# Altium PCB OpenHEG.PcbDoc
Units mm, origin at the board's own origin, x right, y up, seen from the top; angles counter-clockwise.
Board outline 52.5 x 24 mm, 2 copper layers (Top Layer, Bottom Layer); 23 components, 18 nets, 77 pads, 13 vias.
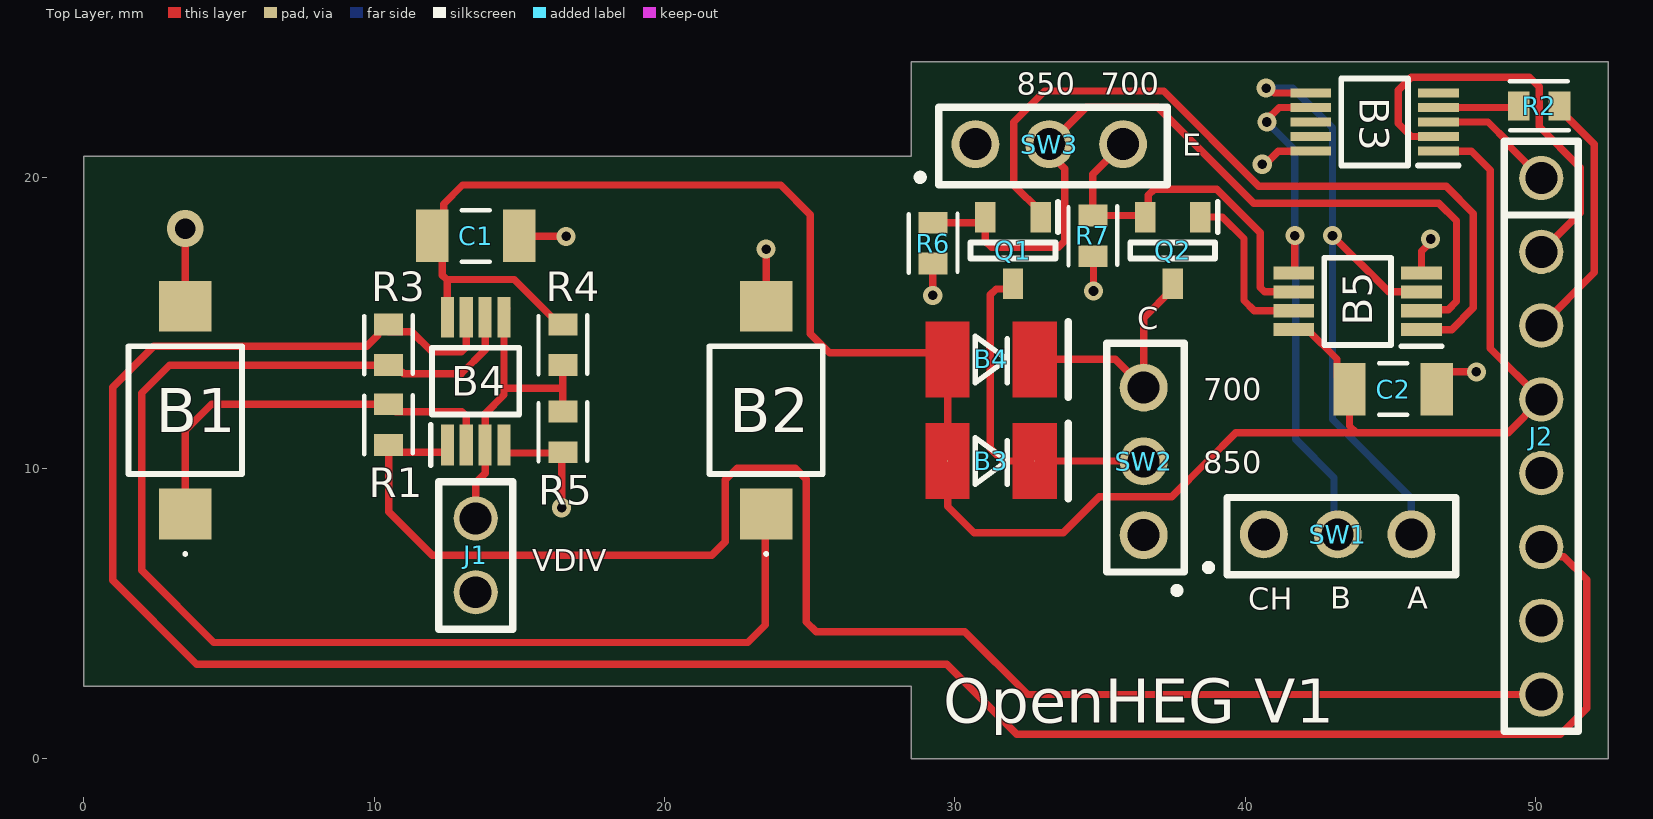
[diagram p0: Top Layer view]
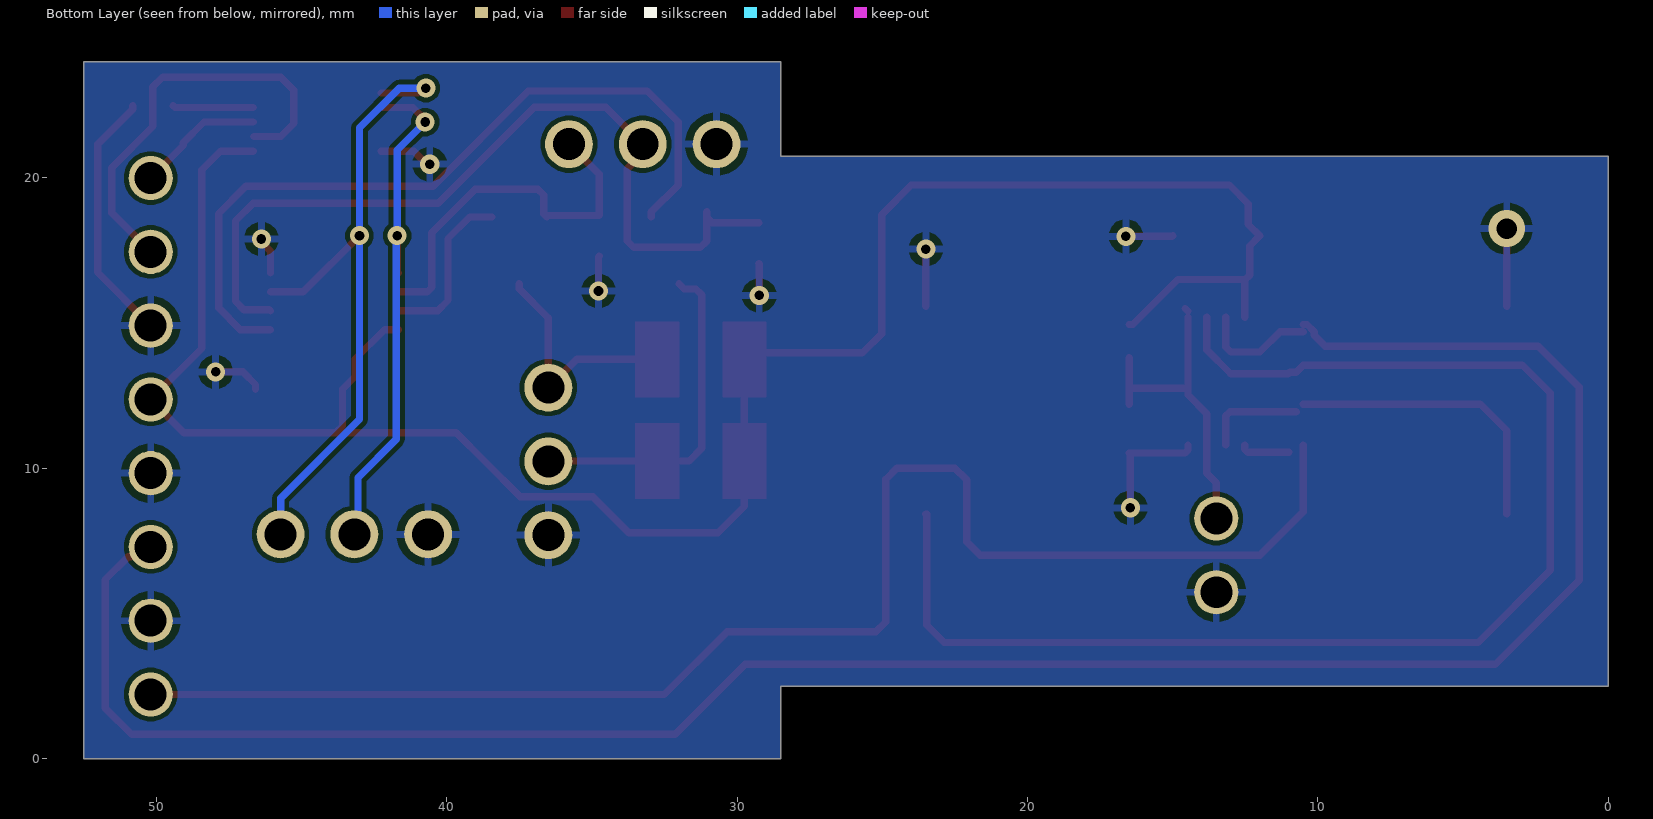
[diagram p1: Bottom Layer view, seen from below]
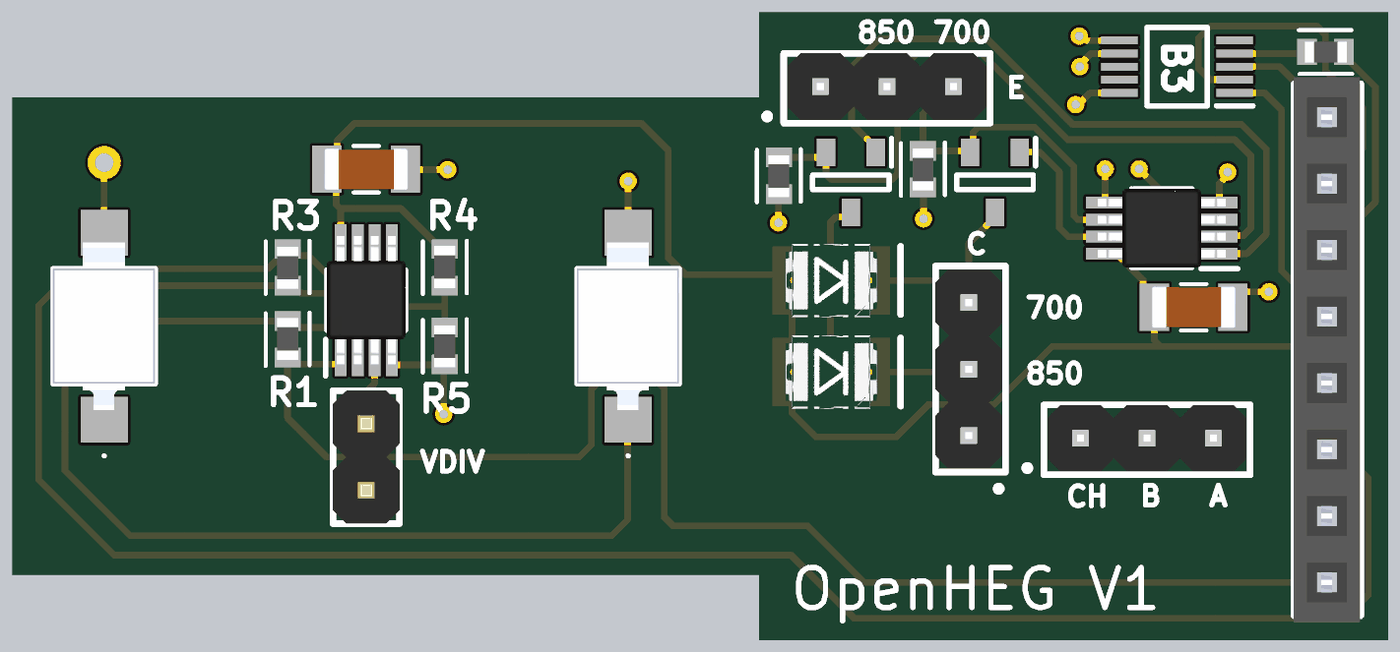
[diagram p2: 3D render of the assembled board from above, using the file's embedded part models]

## Layer stack, top to bottom
Top Solder: solder mask 0.0102, Solder Resist, Dk 3.5
Top Layer: signal copper 0.0356
Dielectric 1: dielectric 0.32, FR-4, Dk 4.8
Bottom Layer: signal copper 0.0356
Bottom Solder: solder mask 0.0102, Solder Resist, Dk 3.5

## Board outline
0,2.5 0,20.75 28.5,20.75 28.5,24 52.5,24 52.5,0 28.5,0 28.5,2.5

## Design rules (kind name [scope] priority, off if disabled: settings)
Clearance [All] p1: gap=0.152 ignorepadtopadclearanceinfootprint=TRUE
MinimumSolderMaskSliver [All] p1: minsoldermaskwidth=0.152
PolygonConnect [All] p1: connectstyle=Relief reliefconductorwidth=0.254 reliefentries=4 polygonreliefangle="90 Angle" airgapwidth=0.254
RoutingVias [All] p1: holewidth=0.33 width=0.66 viastyle="Through Hole" minholewidth=0.33 minwidth=0.66 maxholewidth=0.33 maxwidth=0.66
SilkToSilkClearance [All] p1: silktosilkclearance=0.152
SilkToSolderMaskClearance [IsPad] p1: minsilkscreentomaskgap=0.152 clearancetoexposedcopper=TRUE
SolderMaskExpansion [All] p1: expansion=0.102 istentingtop=FALSE
SupplyNets "Schematic Supply Nets_1" [InNet('GND')] p1: voltage=0.000
SupplyNets "Schematic Supply Nets" [InNet('3V3')] p2: voltage=0.000
Width [All] p1: maxlimit=0.508 minlimit=0.152 preferedwidth=0.152
27 further rules are at their usual default settings.

## Classes and differential pairs
component class OpenHEG: B1 B2 B3 B4 B5 C1 C2 J1 J2 Q1 R1 R2 R3 R5 R6 R7 SW1 SW2

## Components (designator, comment, footprint, x,y, rotation, side; value= is the part's Value field where it differs from the comment)
B1 "VBPW34S" VBPW34S 3.5,12 r90 top locked
B2 "VBPW34S" VBPW34S 23.5,12 r90 top locked
B3 "MCP4728T-E_UN" SOP50P490X110-10N 44.45,21.92 r180 top
B3 "850D" PCBComponent_1 29,8.95 r0 top locked
B4 "TLV272CDGKG4" SOP65P490X110-8N 13.5,13 r90 top
B4 "700" PCBComponent_1 29,12.45 r0 top locked
B5 "TLV272CDGKG4" SOP65P490X110-8N 43.866,15.748 r180 top
C1 "22uF" 1206_Passive_Capacitor 13.5,18 r0 top
C2 "22uF" 1206_Passive_Capacitor 45.085,12.725 r180 top
J1 "2 PIN" 2_PIN_100MIL 13.5,7 r270 top
J2 "JF_8_PIN_FEMALE" "8_PIN_100MIL - Female" 50.19,19.99 r270 top
Q1 "MMBT3904" SOT95P240X120-3N 32,17.5 r270 top
Q2 "MMBT3904" SOT95P240X120-3N 37.5,17.5 r270 top
R1 "47k Ohm" 0603_PASSIVE_Resistor 10.5,11.5 r270 top value=47kOhm
R2 "4.7k Ohm" 0603_PASSIVE_Resistor 50.114,22.479 r180 top
R3 "47k Ohm" 0603_PASSIVE_Resistor 10.5,14.25 r90 top value=47kOhm
R4 "47kOhm" 0603_PASSIVE_Resistor 16.5,14.25 r270 top value="47k Ohm"
R5 "4.7k Ohm" 0603_PASSIVE_Resistor 16.5,11.25 r90 top
R6 "0.5 Ohm" 0603_PASSIVE_Resistor 29.25,17.75 r90 top
R7 "0.5 Ohm" 0603_PASSIVE_Resistor 34.75,18 r90 top
SW1 "PREC003SAAN-RC" 3_PIN_100mil 40.638,7.724 r0 top value="CONN HEADER VERT 3POS 2.54MM"
SW2 "PREC003SAAN-RC" 3_PIN_100mil 36.5,7.696 r90 top value="CONN HEADER VERT 3POS 2.54MM"
SW3 "PREC003SAAN-RC" 3_PIN_100mil 30.709,21.158 r0 top value="CONN HEADER VERT 3POS 2.54MM"

## Footprints (in the part's own frame and the unit in brackets; to place one, negate y for a bottom-side part, rotate by r counter-clockwise, add the part's x,y. Pads: shape width x height; smd on the part's side, far side on the other; paste and mask are expansions set on the pad)
2_PIN_100MIL [mil]
  round 60 hole 43.31: 1(-50,0) 2(50,0)
  silkscreen extent -100,-50 100,50, body extent -100,-50 100,50, height 336
3_PIN_100mil [mm]
  round 1.65 hole 1.1: 1(0,0) 2(2.54,0) 3(5.08,0)
  silkscreen extent -2,-1.4 6.6,1.27, body extent -1.14,-1.27 6.48,1.27, height 8.38
"8_PIN_100MIL - Female" [mil]
  round 60 hole 43.31: 1(0,0) 2(100,0) 3(200,0) 4(300,0) 5(400,0) 6(500,0) 7(600,0) 8(700,0)
  silkscreen extent -50,-50 750,50, body extent -60,-51 760,49, height 335
0603_PASSIVE_Resistor [mm] "Reference: http://livepartlibrary.com/fpdimensions.html"
  rect 0.75x1 smd mask+0: 1(-0.7,0) 2(0.7,0)
  silkscreen extent -1.02,-0.84 1.02,0.84, body extent -0.81,-0.4 0.79,0.4, height 0.55
1206_Passive_Capacitor [mil]
  rect 44x71 smd: 1(-59,0) 2(59,0)
  silkscreen extent -19,-35 19,35, body extent -63,-31 63,32, height 50
PCBComponent_1 [mm]
  round 0.025 smd: 1(0.75,1.3) 2(3.75,1.3)
  Top Layer region: 0,0 0,2.6 1.5,2.6 1.5,0
  Top Layer region: 3,0 3,2.6 4.5,2.6 4.5,0
  silkscreen extent 1.7,0 4.9,2.6, body extent 0.5,-0.1 4,2.7, height 1.65
SOP50P490X110-10N [mm]
  rect 1.4x0.3 smd: 1(-2.2,1) 2(-2.2,0.5) 3(-2.2,0) 4(-2.2,-0.5) 5(-2.2,-1) 6(2.2,-1) 7(2.2,-0.5) 8(2.2,0) 9(2.2,0.5) 10(2.2,1)
  silkscreen extent -2.9,-1.5 1.15,1.5
SOP65P490X110-8N [mm]
  rect 1.4x0.45 smd: 1(-2.2,0.975) 2(-2.2,0.325) 3(-2.2,-0.325) 4(-2.2,-0.975) 5(2.2,-0.975) 6(2.2,-0.325) 7(2.2,0.325) 8(2.2,0.975)
  silkscreen extent -2.9,-1.5 1.15,1.55, body extent -2.45,-1.5 2.45,1.5, height 1.1
SOT95P240X120-3N [mm]
  rect 1.05x0.7 smd: 1(-1.15,0.95) 2(-1.15,-0.95) 3(1.15,0)
  silkscreen extent -1.68,-1.46 0.28,1.55
VBPW34S [mm]
  rect 1.75x1.8 smd: 1(-3.575,0) 2(3.575,0)
  silkscreen extent -5,-1.95 2.2,1.95, body extent -3.2,-1.94 3.2,1.96, height 1.3

## Part data
B1 B2: library part CMP-006-000002-2, "Photodiode PIN Chip 940nm 2-Pin SMD T/R", Manufacturer_Name=Vishay, Mouser Part Number=782-VBPW34S, Arrow Part Number=VBPW34S, Arrow Price/Stock=https://www.arrow.com/en/products/vbpw34s/vishay?utm_currency=USD&region=nac, Datasheet Link=https://componentsearchengine.com/Datasheets/2/VBPW34S.pdf, Design Item ID=VBPW34S, Geometry.Height=1.4mm, Manufacturer_Part_Number=VBPW34S, Mouser Price/Stock=https://www.mouser.co.uk/ProductDetail/Vishay-Semiconductors/VBPW34S?qs=Uj7aA%252BCqp8ZDwjFKEZ8K8A%3D%3D, Source=VBPW34S.SchLib
B3: library part CMP-009-000002-1, "Digital to Analog Converters - DAC Quad 12-bit NV DAC with I2C interface", Arrow Part Number=MCP4728T-E/UN, Manufacturer_Name=Microchip, Mouser Part Number=579-MCP4728T-E/UN, Arrow Price/Stock=https://www.arrow.com/en/products/mcp4728t-eun/microchip-technology?utm_currency=USD&region=nac, Datasheet Link=https://componentsearchengine.com/Datasheets/2/MCP4728T-E_UN.pdf, Design Item ID=MCP4728T-E_UN, Geometry.Height=1.1mm, Manufacturer_Part_Number=MCP4728T-E/UN, Mouser Price/Stock=https://www.mouser.co.uk/ProductDetail/Microchip-Technology/MCP4728T-E-UN?qs=E6wAi2XWqcPJxULNRq0fKQ%3D%3D, Source=MCP4728T-E_UN.SchLib
B3 B4: library part CMP-022-000000-1, Design Item ID=805D, Source=SMT850.SchLib
B4 B5: library part CMP-003-000001-2, "Operational Amplifiers - Op Amps 550-uA/Ch 3-MHz Rail-to-Rail Out", Manufacturer_Name="Texas Instruments", Mouser Part Number=595-TLV272CDGKG4, Datasheet Link=https://www.ti.com/lit/ds/symlink/tlv272.pdf?ts=1621864530946&ref_url=https%253A%252F%252Fwww.ti.com%252Fproduct%252FTLV272, Design Item ID=TLV272CDGKG4, Geometry.Height=1.1mm, Manufacturer_Part_Number=TLV272CDGKG4, Mouser Price/Stock=https://www.mouser.com/Search/Refine.aspx?Keyword=595-TLV272CDGKG4, Source=TLV272CDGKG4.SchLib
C1 C2: library part C_22uF_1206, "22uF ±10% 25V X5R 1206 Multilayer Ceramic Capacitors MLCC - SMD/SMT RoHS", LCSC Part#=C12891, MFR Part #=CL31A226KAHNNNE, Datasheet=https://datasheet.lcsc.com/lcsc/1811031514_Samsung-Electro-Mechanics-CL31A226KAHNNNE_C12891.pdf, Type=basic
J1: library part JM_2_PIN_MALE, "2.54mm Straight 2 1 Header，Breakaway Through Hole,P=2.54mm Pin Header & Female Header ROHS", LCSC Part#=C124375, MFR Part #=B-2100S02P-A110, Datasheet=https://datasheet.lcsc.com/lcsc/1811151421_Ckmtw-Shenzhen-Cankemeng-B-2100S02P-A110_C124375.pdf, Type=Extended
J2: library part CMP-005-000002-1, "8 Position Header Connector 0.100\" (2.54mm) Through Hole Tin", LCSC Part#=C27438, MFR Part #=PPTC081LFBN-RC, Component Type=Standard, Design Item ID=JF_8_PIN_FEMALE, Digikey Link=https://www.digikey.com/product-detail/en/PPTC081LFBN-RC/S7006-ND/810147/?itemSeq=304982354, Pin Count=8, Source=iotaCore.SCHLIB, Type=Extended
Q1 Q2: library part CMP-017-000000-1, "SOT-23-3", Manufacturer_Name=onsemi, Mouser Part Number=512-MMBT3904, Arrow Part Number=MMBT3904, Arrow Price/Stock=https://www.arrow.com/en/products/mmbt3904/on-semiconductor, Datasheet Link=https://www.onsemi.com/download/data-sheet/pdf/PZT3904-D.pdf, Design Item ID=MMBT3904, Geometry.Height=1.2mm, Manufacturer_Part_Number=MMBT3904, Mouser Price/Stock=https://www.mouser.co.uk/ProductDetail/onsemi-Fairchild/MMBT3904?qs=UMEuL5FsraCg3xKjS4uBJQ%3D%3D, Source=MMBT3904.SchLib
R1 R3 R4: library part R_2Ohm_0603, "CHIP RESISTOR - SURFACE MOUNT 47kOHMS ±1% 1/10W 0603 ROHS", LCSC Part#=C22977, MFR Part #=0603WAF200KT5E, Datasheet=https://datasheet.lcsc.com/szlcsc/Uniroyal-Elec-0603WAF200KT5E_C22977.pdf, Type=Basic
R2 R5: library part R_2Ohm_0603, "CHIP RESISTOR - SURFACE MOUNT 4.7kOHMS ±1% 1/10W 0603 ROHS", LCSC Part#=C22977, MFR Part #=0603WAF200KT5E, Datasheet=https://datasheet.lcsc.com/szlcsc/Uniroyal-Elec-0603WAF200KT5E_C22977.pdf, Type=Basic
R6 R7: library part R_2Ohm_0603, "CHIP RESISTOR - SURFACE MOUNT 0.5OHMS ±1% 1/10W 0603 ROHS", LCSC Part#=C22977, MFR Part #=0603WAF200KT5E, Datasheet=https://datasheet.lcsc.com/szlcsc/Uniroyal-Elec-0603WAF200KT5E_C22977.pdf, Type=Basic
SW1 SW2 SW3: library part SW_3Pin_100mil_Switch, "Connector Header Through Hole 3 position 0.100\" (2.54mm)", LCSC Part#=C49257, Digikey Link=https://www.digikey.com/product-detail/en/PREC003SAAN-RC/S1012EC-03-ND/2774851/?itemSeq=304982371, MFR Part #=PREC003SAAN-RC, Type=Extended

## Via types
v1: diameter 0.66, hole 0.33, Top Layer to Bottom Layer, 12 vias
v2: diameter 1.27, hole 0.711, Top Layer to Bottom Layer, 1 vias

## Nets (pads, with @x,y where several pads share a name; then routed paths per layer and width w, separated by ;. In a path a pad name is that pad's centre, name@x,y a point inside that pad or via, vN(x,y) a via of type N, cw(c..) or ccw(c..) an arc to the next point about the centre after c; other vN are vias at no path point)
3V3: B3.1 B4.1@29.75,13.75 B4.8 B5.8 C1.1 C2.2 J2.4 R4.1 | length 74.6
  Top Layer w0.254: B4.8 12.525,16.475 12.5,16.5 ; R4.1 16.375,14.95 14.825,16.5 12.5,16.5 ; B5.8 42.141,14.773 43.155,13.759 43.155,13.157 C2.2 43.586,11.455 43.815,11.227 ; B3.1@46.65,20.92 47.787,20.92 48.438,20.269 48.438,14.122 J2.4 49.047,11.227 43.815,11.227 ; 12.5,16.5 12.351,16.649 12.351,17.65 C1.1 12.394,18.392 12.394,19.099 13.044,19.75 24,19.75 25.025,18.725 25.025,14.625 25.68,13.97 29.53,13.97 29.75,13.75 29.75,10.25 29.75,8.68 30.658,7.772 33.731,7.772 34.976,9.017 37.465,9.017 38.681,10.233 39.675,11.227 43.815,11.227
700_B: B5.7 Q2.1 | length 5.8
  Top Layer w0.254: Q2.1 39.211,18.65 39.952,17.909 39.952,15.775 40.305,15.423 B5.7
700_C: B4.2@32.75,13.75 Q2.3 SW2.3 | length 8.1
  Top Layer w0.254: B4.2@32.75,13.75 35.526,13.75 SW2.3 36.5,15.175 37.5,16.175 Q2.3
700_E: B5.6 Q2.2 R7.2 SW3.3 | length 13.2
  Top Layer w0.254: SW3.3 34.75,20.12 R7.2 36.5,18.7 Q2.2 36.657,18.757 36.657,19.407 36.859,19.609 39.014,19.609 40.513,18.11 40.513,16.222 40.662,16.073 B5.6
850_B: B5.1 Q1.1 | length 27
  Top Layer w0.254: Q1.1 32.95,18.825 32.029,19.746 32.029,21.92 33.096,22.987 37.186,22.987 40.462,19.71 46.914,19.71 47.854,18.771 47.854,15.519 47.107,14.773 B5.1
850_C: B3.2@32.75,10.25 Q1.3 SW2.2 | length 11.7
  Top Layer w0.254: Q1.3 31.82,16.17 31.418,16.17 31.217,15.969 31.217,10.683 31.65,10.25 32.75,10.25 36.486,10.25 SW2.2
850_E: B5.2 Q1.2 R6.2 SW3.2 | length 29.6
  Top Layer w0.254: R6.2 30.85,18.45 Q1.2 ; Q1.2@31.05,18.825 Q1.2 ; B5.2 46.104,15.462 46.983,15.462 47.269,15.748 47.269,18.517 46.66,19.126 40.284,19.126 36.982,22.428 34.519,22.428 SW3.2 33.249,20.845 33.782,20.311 33.782,17.822 33.562,17.602 31.267,17.602 31.05,17.82 Q1.2
A0: B4.1@12.525,10.8 J2.8 R1.2 | length 52.9
  Top Layer w0.254: R1.2 10.5,8.5 12,7 21.63,7 22.098,7.468 22.098,9.598 22.5,10 24.5,10 24.875,9.625 24.875,4.716 25.222,4.369 30.344,4.369 32.503,2.21 J2.8 ; 11,10.55 12.427,10.55 12.525,10.648 B4.1@12.525,10.8
A1: B4.7 J2.6 R3.2 | length 81
  Top Layer w0.254: R3.2@10.5,14.7 11.3,14.7 12,14 13,14 13.175,14.175 B4.7 ; R3.2 10.375,14.95 10.127,14.702 10.127,14.577 9.75,14.2 2.414,14.2 1,12.786 1,6.137 3.886,3.251 29.719,3.251 32.132,0.838 50.851,0.838 51.75,1.737 51.75,6.17 50.965,6.955 50.868,6.955 50.534,7.29 J2.6
CH_A: B3.6 B5.3 SW1.3 | length 23.4
  Top Layer w0.254: v1(40.716,23.089) 40.826,23.089 40.995,22.92 B3.6 ; v1(43.002,18.009) 44.938,16.073 B5.3
  Bottom Layer w0.254: v1(40.716,23.089) 41.631,23.089 43.002,21.717 v1(43.002,18.009) 43.002,11.684 45.718,8.968 SW1.3
CH_B: B3.7 B5.5 SW1.2 | length 18.3
  Top Layer w0.254: v1(40.742,21.92) 40.742,21.993 41.169,22.42 B3.7 ; B5.5 41.707,16.764 v1(41.707,18.009)
  Bottom Layer w0.254: v1(40.742,21.92) 41.707,20.955 v1(41.707,18.009) 41.732,17.983 41.732,10.998 43.053,9.677 43.053,7.849 SW1.2
GND: B1.2 B2.2 B3.10 B4.4 B5.4 C1.2 C2.1 J1.2 J2.3 J2.5 J2.7 R2.1 R5.1 R6.1 R7.1 SW1.1 SW2.1 SW3.1 | length 26.4
  Top Layer w0.254: B1.2 v2(3.5,18.25) ; B4.4 14.475,10.623 14.573,10.525 16.5,10.525 16.459,10.484 v1(16.459,8.636) ; C1.2 15.015,17.983 v1(16.612,17.983) ; B2.2 v1(23.5,17.543) ; v1(29.235,15.951) 29.235,17.035 R6.1 ; R7.1 34.773,17.277 v1(34.773,16.104) ; v1(40.582,20.469) 40.685,20.469 41.136,20.92 B3.10 ; B5.4 46.066,17.468 46.38,17.782 v1(46.38,17.892) ; C2.1 46.584,12.884 47.015,13.316 v1(47.955,13.316) ; J2.3 52.019,16.739 52.019,21.149 50.814,22.354 R2.1
NetB1_1: B1.1 B4.2@13.175,10.8 R1.1 | length 13.7
  Top Layer w0.254: B1.1 3.5,11.298 4.402,12.2 R1.1 ; R1.1@10.75,11.95 13.026,11.95 13.175,11.801 B4.2@13.175,10.8
NetB2_1: B2.1 B4.6 R3.1 | length 46.5
  Top Layer w0.254: B4.6 13.825,14.075 13.009,13.259 11.022,13.259 10.979,13.302 10.748,13.302 R3.1 2.958,13.55 2,12.592 2,6.484 4.484,4 22.872,4 23.475,4.603 23.475,8.425 B2.1
NetB3_4: B3.4 R2.2 | length 2.8
  Top Layer w0.254: B3.4 49.355,22.42 R2.2
SCL: B3.2@46.65,21.42 J2.2 | length 14.7
  Top Layer w0.254: B3.2@46.65,21.42 45.712,21.42 45.263,21.869 45.263,23.012 45.718,23.468 49.786,23.468 50.114,23.139 50.114,21.768 51.537,20.345 51.537,18.796 J2.2
SDA: B3.3 J2.1 | length 4.4
  Top Layer w0.254: B3.3 48.356,21.92 49.066,21.21 49.066,21.114 J2.1
VDIV: B4.3 B4.5 J1.1 R4.2 R5.2 | length 11.1
  Top Layer w0.254: J1.1 13.5,9.5 13.825,9.825 B4.3 13.825,11.875 14.475,12.525 14.475,12.75 ; B4.5 14.475,12.75 ; B4.5@14.475,15.402 B4.5@14.573,15.5 ; R5.2@16.5,12.2 16.5,12.75 ; R4.2@16.5,13.8 16.5,12.75 ; 14.475,12.75 16.5,12.75
pads on no net: B3.5 B3.8 B3.9

## Polygon pours and split planes (outlines as drawn)
GND on Bottom Layer "GND" (solid, pour order 0): 0,20.75 28.5,20.75 28.5,24 52.5,24 52.5,0 28.5,0 28.5,2.5 0,2.5

## Silkscreen, mask and mechanical layers (free items; w line width, h text height)
Top Overlay:
  text "850" at 32.131,22.86 h0.76
  text "700" at 35.027,22.86 h0.76
  text "E" at 37.821,20.752 h0.76
  text "C" at 36.271,14.783 h0.76
  text "700" at 38.557,12.344 h0.76
  text "850" at 38.557,9.83 h0.76
  text "VDIV" at 15.443,6.452 h0.76
  text "B" at 42.926,5.156 h0.76
  text "A" at 45.568,5.156 h0.76
  text "CH" at 40.105,5.133 h0.76
  text "OpenHEG V1" at 29.591,1.244 h1.52
Stiffener:
  rectangle: 28.5,0 52.5,24
  rectangle: 21.336,2.489 25.984,20.777
  rectangle: 9.119,2.388 17.958,20.777
  rectangle: 0,2.515 5.588,20.75